# EAGLE board ADXL335_Breakout-Panel-v14 (EAGLE 6.5.0), part 1 of 2
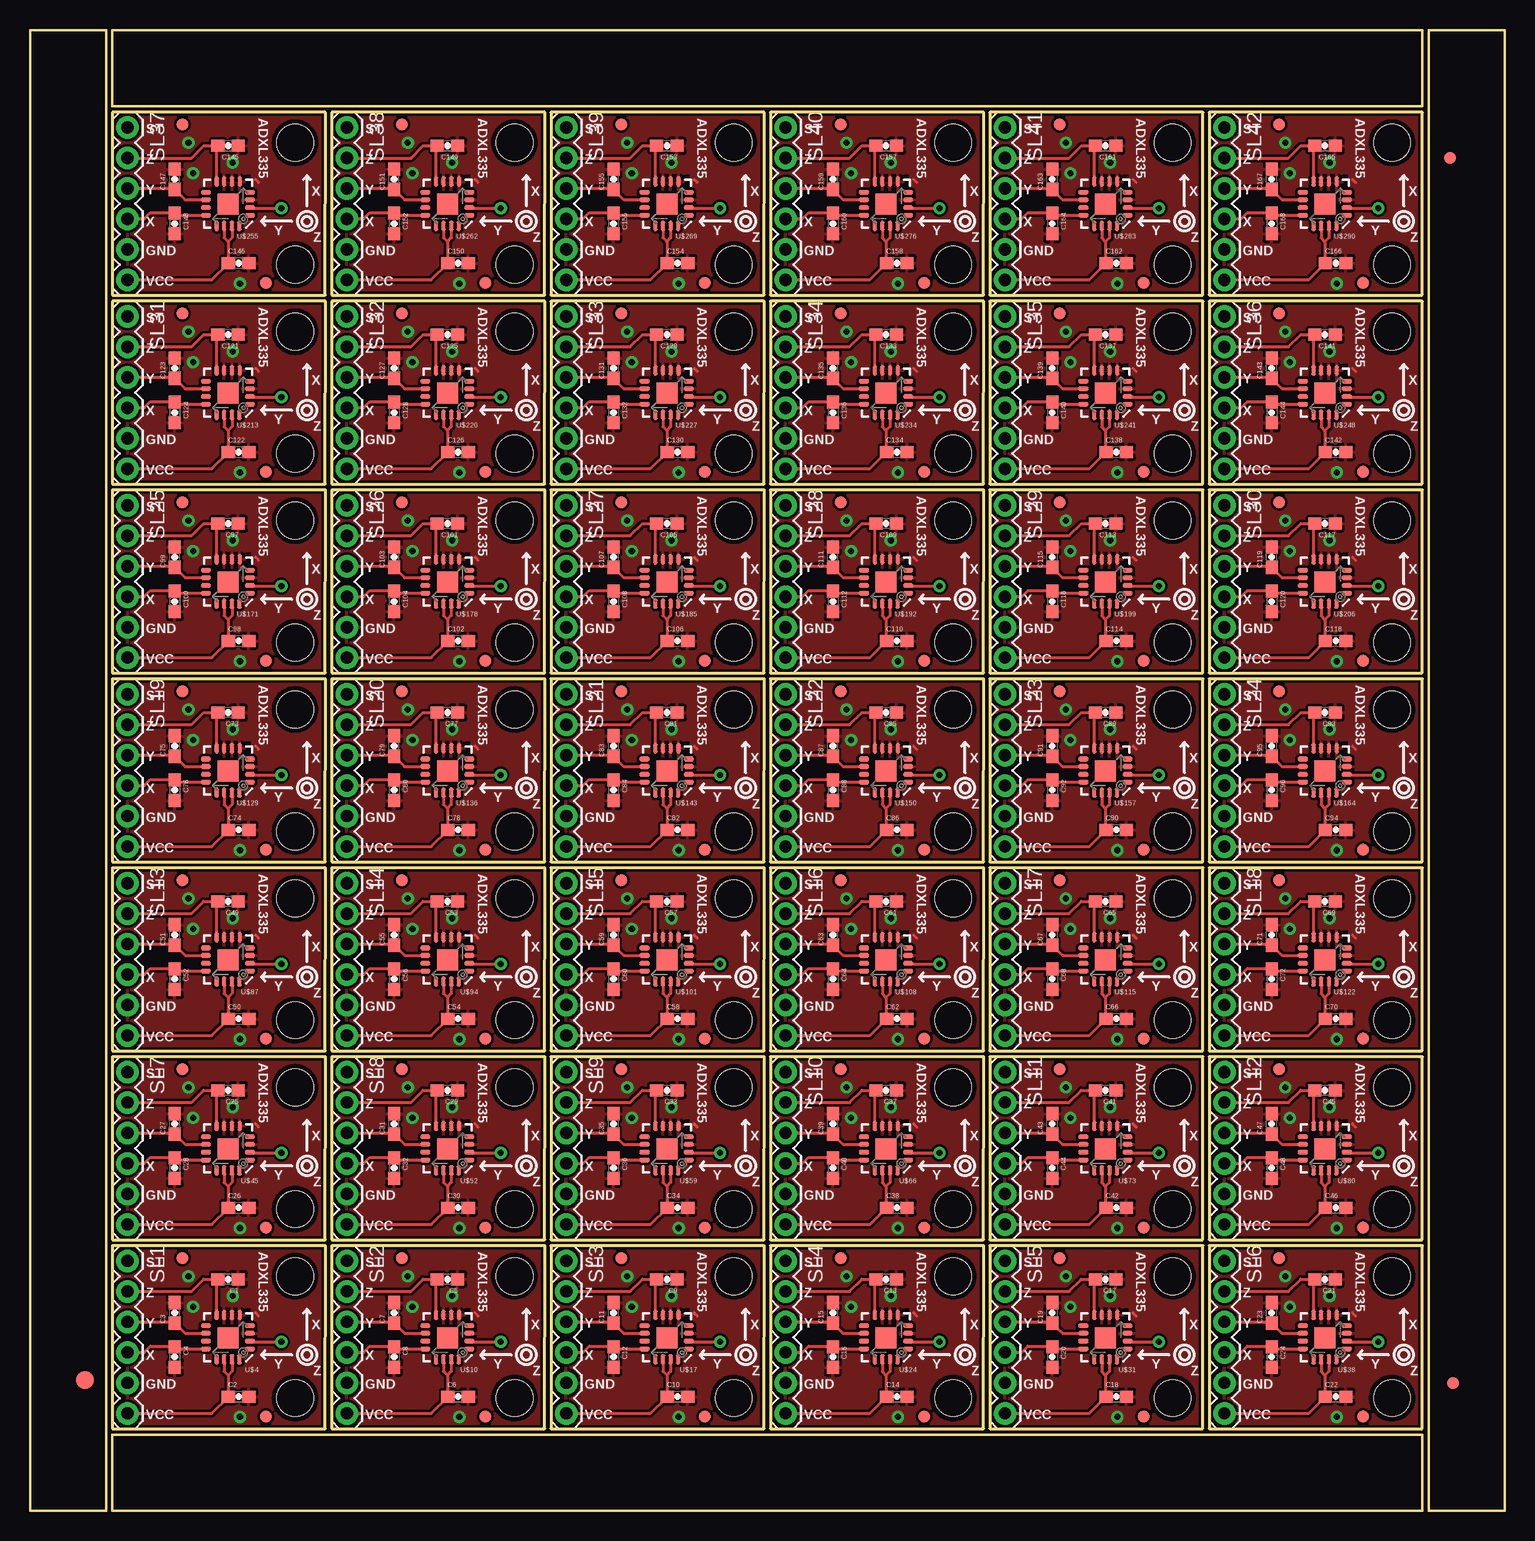
[diagram p0: board, top side]
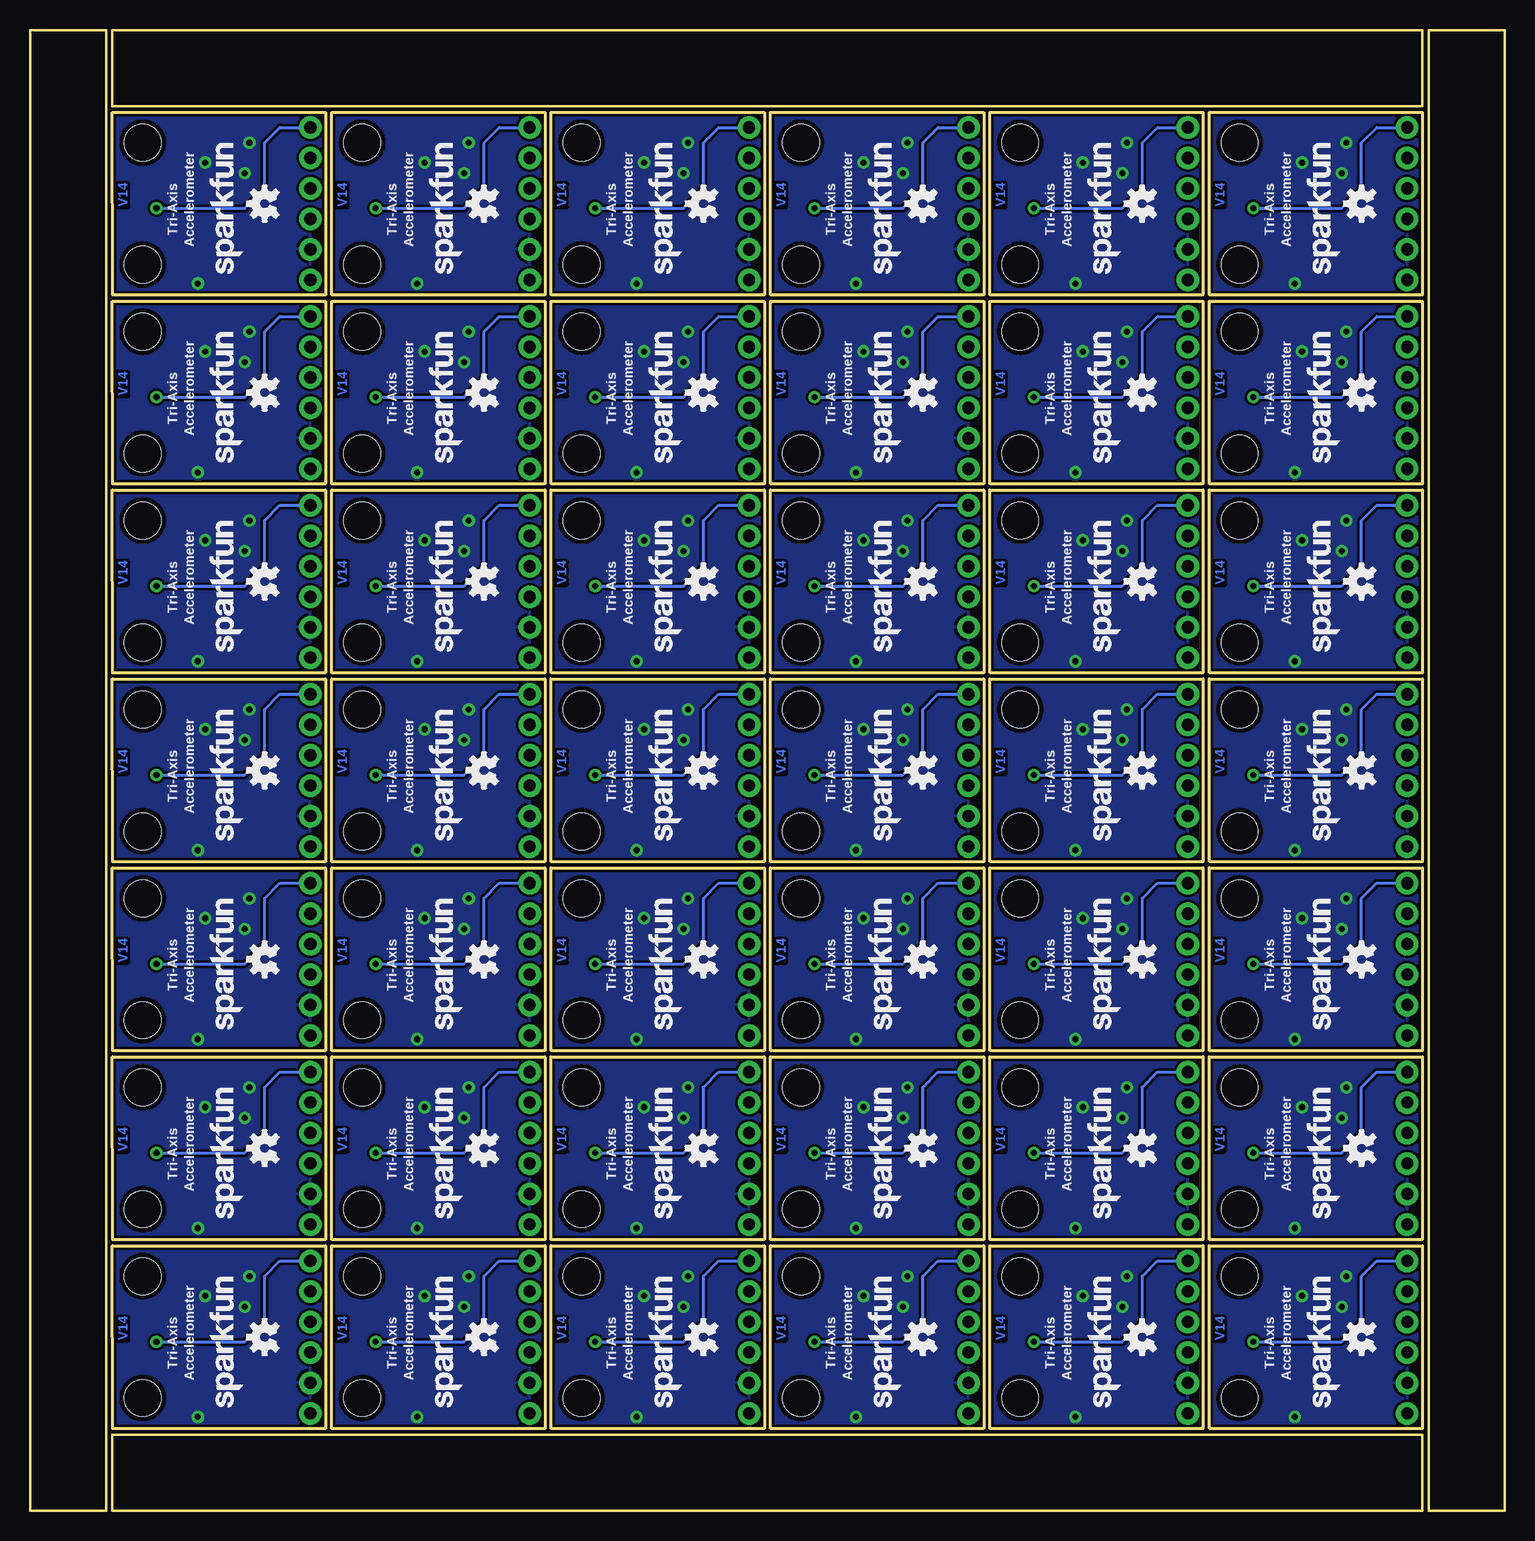
[diagram p1: board, bottom side, seen from below]

Size 122.94 x 123.44 mm. Coordinates in mm from the lower left corner, seen from the top.
Outline: 188 segments
Copper layers (1*16): Top 0.035mm / dielectric 1.5mm / Bottom 0.035mm
Design rules "SparkFun": minimum track width 7mil, minimum drill 15mil, track to track 8mil, track to pad 8mil, pad to pad 8mil, via to via 8mil, smd to smd 8mil, copper to edge 8mil, drill to drill 8mil, minimum pad ring 12mil, minimum via ring 10mil, stop-mask expansion 4mil, vias tented up to drill 20mil, thermal gap 10mil
tRestrict: area 16.4,16.3 to 16.6,16.4; area 17,16.3 to 17.3,16.4; area 18,15.7 to 18.4,16.9; area 34.7,16.3 to 34.9,16.4; area 35.3,16.3 to 35.6,16.4; area 36.3,15.7 to 36.7,16.9; area 53,16.3 to 53.2,16.4; area 53.6,16.3 to 53.9,16.4; area 54.6,15.7 to 55,16.9; area 71.2,16.3 to 71.5,16.4; area 71.9,16.3 to 72.2,16.4; area 72.9,15.7 to 73.3,16.9; 114 more areas

## Footprints (pad centres in the part's own frame; a part is rotated, then mirrored left to right if it is on the bottom)
0603-CAP = smd 1.1 x 1: 1 -0.85,0; 2 0.85,0
FIDUCIAL-1.5X3 = smd 1.5 x 1.5: 1 0,0
FIDUCIAL-1X2 = smd 1 x 1: 1 0,0
1X06 = drill 1.016 pad 1.88: 1 0,0; 2 2.54,0; 3 5.08,0; 4 7.62,0; 5 10.16,0; 6 12.7,0
ADXL335-P = smd 1.75 x 1.75: 0 0,0.051 | smd 0.838 x 0.37: 1 -1.826,0.975; 2 -1.826,0.325; 3 -1.826,-0.325; 4 -1.826,-0.95; 9 1.852,-0.95; 10 1.852,-0.325; 11 1.852,0.325; 12 1.852,0.975 | smd 0.37 x 0.838: 5 -0.975,-1.852; 6 -0.325,-1.852; 7 0.325,-1.852; 8 0.95,-1.852; 13 0.95,1.852; 14 0.325,1.852; 15 -0.325,1.852; 16 -0.95,1.852
STAND-OFF-TIGHT = hole 3.048: 0,0

## Placement (x,y rotation side)
C1  0.1uF  [0603-CAP]  16.51,19.3 180 top
C2  0.1uF  [0603-CAP]  17.4,9.53 0 top
C3  0.1uF  [0603-CAP]  12.06,16.51 90 top
C4  0.1uF  [0603-CAP]  12.06,12.83 270 top
C5  0.1uF  [0603-CAP]  34.8,19.3 180 top
C6  0.1uF  [0603-CAP]  35.69,9.53 0 top
C7  0.1uF  [0603-CAP]  30.35,16.51 90 top
C8  0.1uF  [0603-CAP]  30.35,12.83 270 top
C9  0.1uF  [0603-CAP]  53.09,19.3 180 top
C10  0.1uF  [0603-CAP]  53.98,9.53 0 top
C11  0.1uF  [0603-CAP]  48.64,16.51 90 top
C12  0.1uF  [0603-CAP]  48.64,12.83 270 top
C13  0.1uF  [0603-CAP]  71.37,19.3 180 top
C14  0.1uF  [0603-CAP]  72.26,9.53 0 top
C15  0.1uF  [0603-CAP]  66.93,16.51 90 top
C16  0.1uF  [0603-CAP]  66.93,12.83 270 top
C17  0.1uF  [0603-CAP]  89.66,19.3 180 top
C18  0.1uF  [0603-CAP]  90.55,9.53 0 top
C19  0.1uF  [0603-CAP]  85.22,16.51 90 top
C20  0.1uF  [0603-CAP]  85.22,12.83 270 top
C21  0.1uF  [0603-CAP]  107.95,19.3 180 top
C22  0.1uF  [0603-CAP]  108.84,9.53 0 top
C23  0.1uF  [0603-CAP]  103.5,16.51 90 top
C24  0.1uF  [0603-CAP]  103.5,12.83 270 top
C25  0.1uF  [0603-CAP]  16.51,35.05 180 top
C26  0.1uF  [0603-CAP]  17.4,25.27 0 top
C27  0.1uF  [0603-CAP]  12.06,32.26 90 top
C28  0.1uF  [0603-CAP]  12.06,28.57 270 top
C29  0.1uF  [0603-CAP]  34.8,35.05 180 top
C30  0.1uF  [0603-CAP]  35.69,25.27 0 top
C31  0.1uF  [0603-CAP]  30.35,32.26 90 top
C32  0.1uF  [0603-CAP]  30.35,28.57 270 top
C33  0.1uF  [0603-CAP]  53.09,35.05 180 top
C34  0.1uF  [0603-CAP]  53.98,25.27 0 top
C35  0.1uF  [0603-CAP]  48.64,32.26 90 top
C36  0.1uF  [0603-CAP]  48.64,28.57 270 top
C37  0.1uF  [0603-CAP]  71.37,35.05 180 top
C38  0.1uF  [0603-CAP]  72.26,25.27 0 top
C39  0.1uF  [0603-CAP]  66.93,32.26 90 top
C40  0.1uF  [0603-CAP]  66.93,28.57 270 top
C41  0.1uF  [0603-CAP]  89.66,35.05 180 top
C42  0.1uF  [0603-CAP]  90.55,25.27 0 top
C43  0.1uF  [0603-CAP]  85.22,32.26 90 top
C44  0.1uF  [0603-CAP]  85.22,28.57 270 top
C45  0.1uF  [0603-CAP]  107.95,35.05 180 top
C46  0.1uF  [0603-CAP]  108.84,25.27 0 top
C47  0.1uF  [0603-CAP]  103.5,32.26 90 top
C48  0.1uF  [0603-CAP]  103.5,28.57 270 top
C49  0.1uF  [0603-CAP]  16.51,50.8 180 top
C50  0.1uF  [0603-CAP]  17.4,41.02 0 top
C51  0.1uF  [0603-CAP]  12.06,48.01 90 top
C52  0.1uF  [0603-CAP]  12.06,44.32 270 top
C53  0.1uF  [0603-CAP]  34.8,50.8 180 top
C54  0.1uF  [0603-CAP]  35.69,41.02 0 top
C55  0.1uF  [0603-CAP]  30.35,48.01 90 top
C56  0.1uF  [0603-CAP]  30.35,44.32 270 top
C57  0.1uF  [0603-CAP]  53.09,50.8 180 top
C58  0.1uF  [0603-CAP]  53.98,41.02 0 top
C59  0.1uF  [0603-CAP]  48.64,48.01 90 top
C60  0.1uF  [0603-CAP]  48.64,44.32 270 top
C61  0.1uF  [0603-CAP]  71.37,50.8 180 top
C62  0.1uF  [0603-CAP]  72.26,41.02 0 top
C63  0.1uF  [0603-CAP]  66.93,48.01 90 top
C64  0.1uF  [0603-CAP]  66.93,44.32 270 top
C65  0.1uF  [0603-CAP]  89.66,50.8 180 top
C66  0.1uF  [0603-CAP]  90.55,41.02 0 top
C67  0.1uF  [0603-CAP]  85.22,48.01 90 top
C68  0.1uF  [0603-CAP]  85.22,44.32 270 top
C69  0.1uF  [0603-CAP]  107.95,50.8 180 top
C70  0.1uF  [0603-CAP]  108.84,41.02 0 top
C71  0.1uF  [0603-CAP]  103.5,48.01 90 top
C72  0.1uF  [0603-CAP]  103.5,44.32 270 top
C73  0.1uF  [0603-CAP]  16.51,66.55 180 top
C74  0.1uF  [0603-CAP]  17.4,56.77 0 top
C75  0.1uF  [0603-CAP]  12.06,63.75 90 top
C76  0.1uF  [0603-CAP]  12.06,60.07 270 top
C77  0.1uF  [0603-CAP]  34.8,66.55 180 top
C78  0.1uF  [0603-CAP]  35.69,56.77 0 top
C79  0.1uF  [0603-CAP]  30.35,63.75 90 top
C80  0.1uF  [0603-CAP]  30.35,60.07 270 top
C81  0.1uF  [0603-CAP]  53.09,66.55 180 top
C82  0.1uF  [0603-CAP]  53.98,56.77 0 top
C83  0.1uF  [0603-CAP]  48.64,63.75 90 top
C84  0.1uF  [0603-CAP]  48.64,60.07 270 top
C85  0.1uF  [0603-CAP]  71.37,66.55 180 top
C86  0.1uF  [0603-CAP]  72.26,56.77 0 top
C87  0.1uF  [0603-CAP]  66.93,63.75 90 top
C88  0.1uF  [0603-CAP]  66.93,60.07 270 top
C89  0.1uF  [0603-CAP]  89.66,66.55 180 top
C90  0.1uF  [0603-CAP]  90.55,56.77 0 top
C91  0.1uF  [0603-CAP]  85.22,63.75 90 top
C92  0.1uF  [0603-CAP]  85.22,60.07 270 top
C93  0.1uF  [0603-CAP]  107.95,66.55 180 top
C94  0.1uF  [0603-CAP]  108.84,56.77 0 top
C95  0.1uF  [0603-CAP]  103.5,63.75 90 top
C96  0.1uF  [0603-CAP]  103.5,60.07 270 top
C97  0.1uF  [0603-CAP]  16.51,82.3 180 top
C98  0.1uF  [0603-CAP]  17.4,72.52 0 top
C99  0.1uF  [0603-CAP]  12.06,79.5 90 top
C100  0.1uF  [0603-CAP]  12.06,75.82 270 top
C101  0.1uF  [0603-CAP]  34.8,82.3 180 top
C102  0.1uF  [0603-CAP]  35.69,72.52 0 top
C103  0.1uF  [0603-CAP]  30.35,79.5 90 top
C104  0.1uF  [0603-CAP]  30.35,75.82 270 top
C105  0.1uF  [0603-CAP]  53.09,82.3 180 top
C106  0.1uF  [0603-CAP]  53.98,72.52 0 top
C107  0.1uF  [0603-CAP]  48.64,79.5 90 top
C108  0.1uF  [0603-CAP]  48.64,75.82 270 top
C109  0.1uF  [0603-CAP]  71.37,82.3 180 top
C110  0.1uF  [0603-CAP]  72.26,72.52 0 top
C111  0.1uF  [0603-CAP]  66.93,79.5 90 top
C112  0.1uF  [0603-CAP]  66.93,75.82 270 top
C113  0.1uF  [0603-CAP]  89.66,82.3 180 top
C114  0.1uF  [0603-CAP]  90.55,72.52 0 top
C115  0.1uF  [0603-CAP]  85.22,79.5 90 top
C116  0.1uF  [0603-CAP]  85.22,75.82 270 top
C117  0.1uF  [0603-CAP]  107.95,82.3 180 top
C118  0.1uF  [0603-CAP]  108.84,72.52 0 top
C119  0.1uF  [0603-CAP]  103.5,79.5 90 top
C120  0.1uF  [0603-CAP]  103.5,75.82 270 top
C121  0.1uF  [0603-CAP]  16.51,98.04 180 top
C122  0.1uF  [0603-CAP]  17.4,88.27 0 top
C123  0.1uF  [0603-CAP]  12.06,95.25 90 top
C124  0.1uF  [0603-CAP]  12.06,91.57 270 top
C125  0.1uF  [0603-CAP]  34.8,98.04 180 top
C126  0.1uF  [0603-CAP]  35.69,88.27 0 top
C127  0.1uF  [0603-CAP]  30.35,95.25 90 top
C128  0.1uF  [0603-CAP]  30.35,91.57 270 top
C129  0.1uF  [0603-CAP]  53.09,98.04 180 top
C130  0.1uF  [0603-CAP]  53.98,88.27 0 top
C131  0.1uF  [0603-CAP]  48.64,95.25 90 top
C132  0.1uF  [0603-CAP]  48.64,91.57 270 top
C133  0.1uF  [0603-CAP]  71.37,98.04 180 top
C134  0.1uF  [0603-CAP]  72.26,88.27 0 top
C135  0.1uF  [0603-CAP]  66.93,95.25 90 top
C136  0.1uF  [0603-CAP]  66.93,91.57 270 top
C137  0.1uF  [0603-CAP]  89.66,98.04 180 top
C138  0.1uF  [0603-CAP]  90.55,88.27 0 top
C139  0.1uF  [0603-CAP]  85.22,95.25 90 top
C140  0.1uF  [0603-CAP]  85.22,91.57 270 top
C141  0.1uF  [0603-CAP]  107.95,98.04 180 top
C142  0.1uF  [0603-CAP]  108.84,88.27 0 top
C143  0.1uF  [0603-CAP]  103.5,95.25 90 top
C144  0.1uF  [0603-CAP]  103.5,91.57 270 top
C145  0.1uF  [0603-CAP]  16.51,113.79 180 top
C146  0.1uF  [0603-CAP]  17.4,104.01 0 top
C147  0.1uF  [0603-CAP]  12.06,111 90 top
C148  0.1uF  [0603-CAP]  12.06,107.31 270 top
C149  0.1uF  [0603-CAP]  34.8,113.79 180 top
C150  0.1uF  [0603-CAP]  35.69,104.01 0 top
C151  0.1uF  [0603-CAP]  30.35,111 90 top
C152  0.1uF  [0603-CAP]  30.35,107.31 270 top
C153  0.1uF  [0603-CAP]  53.09,113.79 180 top
C154  0.1uF  [0603-CAP]  53.98,104.01 0 top
C155  0.1uF  [0603-CAP]  48.64,111 90 top
C156  0.1uF  [0603-CAP]  48.64,107.31 270 top
C157  0.1uF  [0603-CAP]  71.37,113.79 180 top
C158  0.1uF  [0603-CAP]  72.26,104.01 0 top
C159  0.1uF  [0603-CAP]  66.93,111 90 top
C160  0.1uF  [0603-CAP]  66.93,107.31 270 top
C161  0.1uF  [0603-CAP]  89.66,113.79 180 top
C162  0.1uF  [0603-CAP]  90.55,104.01 0 top
C163  0.1uF  [0603-CAP]  85.22,111 90 top
C164  0.1uF  [0603-CAP]  85.22,107.31 270 top
C165  0.1uF  [0603-CAP]  107.95,113.79 180 top
C166  0.1uF  [0603-CAP]  108.84,104.01 0 top
C167  0.1uF  [0603-CAP]  103.5,111 90 top
C168  0.1uF  [0603-CAP]  103.5,107.31 270 top
E$1  [FIDUCIAL-1.5X3]  4.57,10.92 0 top
E$4  [FIDUCIAL-1X2]  118.62,10.67 0 top
E$5  [FIDUCIAL-1X2]  118.36,112.78 180 top
SL1  [1X06]  8.13,20.83 270 top
SL2  [1X06]  26.42,20.83 270 top
SL3  [1X06]  44.7,20.83 270 top
SL4  [1X06]  62.99,20.83 270 top
SL5  [1X06]  81.28,20.83 270 top
SL6  [1X06]  99.57,20.83 270 top
SL7  [1X06]  8.13,36.58 270 top
SL8  [1X06]  26.42,36.58 270 top
SL9  [1X06]  44.7,36.58 270 top
SL10  [1X06]  62.99,36.58 270 top
SL11  [1X06]  81.28,36.58 270 top
SL12  [1X06]  99.57,36.58 270 top
SL13  [1X06]  8.13,52.32 270 top
SL14  [1X06]  26.42,52.32 270 top
SL15  [1X06]  44.7,52.32 270 top
SL16  [1X06]  62.99,52.32 270 top
SL17  [1X06]  81.28,52.32 270 top
SL18  [1X06]  99.57,52.32 270 top
SL19  [1X06]  8.13,68.07 270 top
SL20  [1X06]  26.42,68.07 270 top
SL21  [1X06]  44.7,68.07 270 top
SL22  [1X06]  62.99,68.07 270 top
SL23  [1X06]  81.28,68.07 270 top
SL24  [1X06]  99.57,68.07 270 top
SL25  [1X06]  8.13,83.82 270 top
SL26  [1X06]  26.42,83.82 270 top
SL27  [1X06]  44.7,83.82 270 top
SL28  [1X06]  62.99,83.82 270 top
SL29  [1X06]  81.28,83.82 270 top
SL30  [1X06]  99.57,83.82 270 top
SL31  [1X06]  8.13,99.57 270 top
SL32  [1X06]  26.42,99.57 270 top
SL33  [1X06]  44.7,99.57 270 top
SL34  [1X06]  62.99,99.57 270 top
SL35  [1X06]  81.28,99.57 270 top
SL36  [1X06]  99.57,99.57 270 top
SL37  [1X06]  8.13,115.32 270 top
SL38  [1X06]  26.42,115.32 270 top
SL39  [1X06]  44.7,115.32 270 top
SL40  [1X06]  62.99,115.32 270 top
SL41  [1X06]  81.28,115.32 270 top
SL42  [1X06]  99.57,115.32 270 top
U$1  FIDUCIAL1X2  [FIDUCIAL-1X2]  12.7,21.08 0 top
U$2  FIDUCIAL1X2  [FIDUCIAL-1X2]  30.99,21.08 0 top
U$3  FIDUCIAL1X2  [FIDUCIAL-1X2]  19.68,7.87 0 top
U$4  ADXL335-PATRICK""  [ADXL335-P]  16.51,14.48 180 top
U$5  [OSHW-LOGO-S]  11.94,14.48 90 bottom
U$6  [STAND-OFF-TIGHT]  22.1,9.4 0 top
U$7  [STAND-OFF-TIGHT]  22.1,19.56 0 top
U$8  [SFE_LOGO_NAME_.1]  13.21,8.13 90 bottom
U$9  FIDUCIAL1X2  [FIDUCIAL-1X2]  37.97,7.87 0 top
U$10  ADXL335-PATRICK""  [ADXL335-P]  34.8,14.48 180 top
U$11  [STAND-OFF-TIGHT]  40.39,9.4 0 top
U$12  [STAND-OFF-TIGHT]  40.39,19.56 0 top
U$13  [OSHW-LOGO-S]  30.23,14.48 90 bottom
U$14  [SFE_LOGO_NAME_.1]  31.5,8.13 90 bottom
U$15  FIDUCIAL1X2  [FIDUCIAL-1X2]  49.28,21.08 0 top
U$16  FIDUCIAL1X2  [FIDUCIAL-1X2]  56.26,7.87 0 top
U$17  ADXL335-PATRICK""  [ADXL335-P]  53.09,14.48 180 top
U$18  [STAND-OFF-TIGHT]  58.67,9.4 0 top
U$19  [STAND-OFF-TIGHT]  58.67,19.56 0 top
U$20  [OSHW-LOGO-S]  48.51,14.48 90 bottom
U$21  [SFE_LOGO_NAME_.1]  49.78,8.13 90 bottom
U$22  FIDUCIAL1X2  [FIDUCIAL-1X2]  67.56,21.08 0 top
U$23  FIDUCIAL1X2  [FIDUCIAL-1X2]  74.55,7.87 0 top
U$24  ADXL335-PATRICK""  [ADXL335-P]  71.37,14.48 180 top
U$25  [STAND-OFF-TIGHT]  76.96,9.4 0 top
U$26  [STAND-OFF-TIGHT]  76.96,19.56 0 top
U$27  [OSHW-LOGO-S]  66.8,14.48 90 bottom
U$28  [SFE_LOGO_NAME_.1]  68.07,8.13 90 bottom
U$29  FIDUCIAL1X2  [FIDUCIAL-1X2]  85.85,21.08 0 top
U$30  FIDUCIAL1X2  [FIDUCIAL-1X2]  92.84,7.87 0 top
U$31  ADXL335-PATRICK""  [ADXL335-P]  89.66,14.48 180 top
U$32  [STAND-OFF-TIGHT]  95.25,9.4 0 top
U$33  [STAND-OFF-TIGHT]  95.25,19.56 0 top
U$34  [OSHW-LOGO-S]  85.09,14.48 90 bottom
U$35  [SFE_LOGO_NAME_.1]  86.36,8.13 90 bottom
U$36  FIDUCIAL1X2  [FIDUCIAL-1X2]  104.14,21.08 0 top
U$37  FIDUCIAL1X2  [FIDUCIAL-1X2]  111.12,7.87 0 top
U$38  ADXL335-PATRICK""  [ADXL335-P]  107.95,14.48 180 top
U$39  [STAND-OFF-TIGHT]  113.54,9.4 0 top
U$40  [STAND-OFF-TIGHT]  113.54,19.56 0 top
U$41  [OSHW-LOGO-S]  103.38,14.48 90 bottom
U$42  [SFE_LOGO_NAME_.1]  104.65,8.13 90 bottom
U$43  FIDUCIAL1X2  [FIDUCIAL-1X2]  12.7,36.83 0 top
U$44  FIDUCIAL1X2  [FIDUCIAL-1X2]  19.68,23.62 0 top
U$45  ADXL335-PATRICK""  [ADXL335-P]  16.51,30.23 180 top
U$46  [STAND-OFF-TIGHT]  22.1,25.15 0 top
U$47  [STAND-OFF-TIGHT]  22.1,35.31 0 top
U$48  [OSHW-LOGO-S]  11.94,30.23 90 bottom
U$49  [SFE_LOGO_NAME_.1]  13.21,23.88 90 bottom
U$50  FIDUCIAL1X2  [FIDUCIAL-1X2]  30.99,36.83 0 top
U$51  FIDUCIAL1X2  [FIDUCIAL-1X2]  37.97,23.62 0 top
U$52  ADXL335-PATRICK""  [ADXL335-P]  34.8,30.23 180 top
U$53  [STAND-OFF-TIGHT]  40.39,25.15 0 top
U$54  [STAND-OFF-TIGHT]  40.39,35.31 0 top
U$55  [OSHW-LOGO-S]  30.23,30.23 90 bottom
U$56  [SFE_LOGO_NAME_.1]  31.5,23.88 90 bottom
U$57  FIDUCIAL1X2  [FIDUCIAL-1X2]  49.28,36.83 0 top
U$58  FIDUCIAL1X2  [FIDUCIAL-1X2]  56.26,23.62 0 top
U$59  ADXL335-PATRICK""  [ADXL335-P]  53.09,30.23 180 top
U$60  [STAND-OFF-TIGHT]  58.67,25.15 0 top
U$61  [STAND-OFF-TIGHT]  58.67,35.31 0 top
U$62  [OSHW-LOGO-S]  48.51,30.23 90 bottom
U$63  [SFE_LOGO_NAME_.1]  49.78,23.88 90 bottom
U$64  FIDUCIAL1X2  [FIDUCIAL-1X2]  67.56,36.83 0 top
U$65  FIDUCIAL1X2  [FIDUCIAL-1X2]  74.55,23.62 0 top
U$66  ADXL335-PATRICK""  [ADXL335-P]  71.37,30.23 180 top
U$67  [STAND-OFF-TIGHT]  76.96,25.15 0 top
U$68  [STAND-OFF-TIGHT]  76.96,35.31 0 top
U$69  [OSHW-LOGO-S]  66.8,30.23 90 bottom
U$70  [SFE_LOGO_NAME_.1]  68.07,23.88 90 bottom
U$71  FIDUCIAL1X2  [FIDUCIAL-1X2]  85.85,36.83 0 top
U$72  FIDUCIAL1X2  [FIDUCIAL-1X2]  92.84,23.62 0 top
U$73  ADXL335-PATRICK""  [ADXL335-P]  89.66,30.23 180 top
U$74  [STAND-OFF-TIGHT]  95.25,25.15 0 top
U$75  [STAND-OFF-TIGHT]  95.25,35.31 0 top
U$76  [OSHW-LOGO-S]  85.09,30.23 90 bottom
U$77  [SFE_LOGO_NAME_.1]  86.36,23.88 90 bottom
U$78  FIDUCIAL1X2  [FIDUCIAL-1X2]  104.14,36.83 0 top
U$79  FIDUCIAL1X2  [FIDUCIAL-1X2]  111.12,23.62 0 top
U$80  ADXL335-PATRICK""  [ADXL335-P]  107.95,30.23 180 top
U$81  [STAND-OFF-TIGHT]  113.54,25.15 0 top
U$82  [STAND-OFF-TIGHT]  113.54,35.31 0 top
U$83  [OSHW-LOGO-S]  103.38,30.23 90 bottom
U$84  [SFE_LOGO_NAME_.1]  104.65,23.88 90 bottom
U$85  FIDUCIAL1X2  [FIDUCIAL-1X2]  12.7,52.58 0 top
U$86  FIDUCIAL1X2  [FIDUCIAL-1X2]  19.68,39.37 0 top
U$87  ADXL335-PATRICK""  [ADXL335-P]  16.51,45.97 180 top
U$88  [STAND-OFF-TIGHT]  22.1,40.89 0 top
U$89  [STAND-OFF-TIGHT]  22.1,51.05 0 top
U$90  [OSHW-LOGO-S]  11.94,45.97 90 bottom
U$91  [SFE_LOGO_NAME_.1]  13.21,39.62 90 bottom
U$92  FIDUCIAL1X2  [FIDUCIAL-1X2]  30.99,52.58 0 top
U$93  FIDUCIAL1X2  [FIDUCIAL-1X2]  37.97,39.37 0 top
U$94  ADXL335-PATRICK""  [ADXL335-P]  34.8,45.97 180 top
U$95  [STAND-OFF-TIGHT]  40.39,40.89 0 top
U$96  [STAND-OFF-TIGHT]  40.39,51.05 0 top
U$97  [OSHW-LOGO-S]  30.23,45.97 90 bottom
U$98  [SFE_LOGO_NAME_.1]  31.5,39.62 90 bottom
U$99  FIDUCIAL1X2  [FIDUCIAL-1X2]  49.28,52.58 0 top
U$100  FIDUCIAL1X2  [FIDUCIAL-1X2]  56.26,39.37 0 top
U$101  ADXL335-PATRICK""  [ADXL335-P]  53.09,45.97 180 top
U$102  [STAND-OFF-TIGHT]  58.67,40.89 0 top
U$103  [STAND-OFF-TIGHT]  58.67,51.05 0 top
U$104  [OSHW-LOGO-S]  48.51,45.97 90 bottom
U$105  [SFE_LOGO_NAME_.1]  49.78,39.62 90 bottom
U$106  FIDUCIAL1X2  [FIDUCIAL-1X2]  67.56,52.58 0 top
U$107  FIDUCIAL1X2  [FIDUCIAL-1X2]  74.55,39.37 0 top
U$108  ADXL335-PATRICK""  [ADXL335-P]  71.37,45.97 180 top
U$109  [STAND-OFF-TIGHT]  76.96,40.89 0 top
U$110  [STAND-OFF-TIGHT]  76.96,51.05 0 top
U$111  [OSHW-LOGO-S]  66.8,45.97 90 bottom
U$112  [SFE_LOGO_NAME_.1]  68.07,39.62 90 bottom
U$113  FIDUCIAL1X2  [FIDUCIAL-1X2]  85.85,52.58 0 top
U$114  FIDUCIAL1X2  [FIDUCIAL-1X2]  92.84,39.37 0 top
U$115  ADXL335-PATRICK""  [ADXL335-P]  89.66,45.97 180 top
U$116  [STAND-OFF-TIGHT]  95.25,40.89 0 top
U$117  [STAND-OFF-TIGHT]  95.25,51.05 0 top
U$118  [OSHW-LOGO-S]  85.09,45.97 90 bottom
U$119  [SFE_LOGO_NAME_.1]  86.36,39.62 90 bottom
U$120  FIDUCIAL1X2  [FIDUCIAL-1X2]  104.14,52.58 0 top
U$121  FIDUCIAL1X2  [FIDUCIAL-1X2]  111.12,39.37 0 top
U$122  ADXL335-PATRICK""  [ADXL335-P]  107.95,45.97 180 top
U$123  [STAND-OFF-TIGHT]  113.54,40.89 0 top
U$124  [STAND-OFF-TIGHT]  113.54,51.05 0 top
U$125  [OSHW-LOGO-S]  103.38,45.97 90 bottom
U$126  [SFE_LOGO_NAME_.1]  104.65,39.62 90 bottom
U$127  FIDUCIAL1X2  [FIDUCIAL-1X2]  12.7,68.33 0 top
U$128  FIDUCIAL1X2  [FIDUCIAL-1X2]  19.68,55.12 0 top
U$129  ADXL335-PATRICK""  [ADXL335-P]  16.51,61.72 180 top
U$130  [STAND-OFF-TIGHT]  22.1,56.64 0 top
U$131  [STAND-OFF-TIGHT]  22.1,66.8 0 top
U$132  [OSHW-LOGO-S]  11.94,61.72 90 bottom
U$133  [SFE_LOGO_NAME_.1]  13.21,55.37 90 bottom
U$134  FIDUCIAL1X2  [FIDUCIAL-1X2]  30.99,68.33 0 top
U$135  FIDUCIAL1X2  [FIDUCIAL-1X2]  37.97,55.12 0 top
U$136  ADXL335-PATRICK""  [ADXL335-P]  34.8,61.72 180 top
U$137  [STAND-OFF-TIGHT]  40.39,56.64 0 top
U$138  [STAND-OFF-TIGHT]  40.39,66.8 0 top
U$139  [OSHW-LOGO-S]  30.23,61.72 90 bottom
U$140  [SFE_LOGO_NAME_.1]  31.5,55.37 90 bottom
U$141  FIDUCIAL1X2  [FIDUCIAL-1X2]  49.28,68.33 0 top
U$142  FIDUCIAL1X2  [FIDUCIAL-1X2]  56.26,55.12 0 top
U$143  ADXL335-PATRICK""  [ADXL335-P]  53.09,61.72 180 top
U$144  [STAND-OFF-TIGHT]  58.67,56.64 0 top
U$145  [STAND-OFF-TIGHT]  58.67,66.8 0 top
U$146  [OSHW-LOGO-S]  48.51,61.72 90 bottom
U$147  [SFE_LOGO_NAME_.1]  49.78,55.37 90 bottom
U$148  FIDUCIAL1X2  [FIDUCIAL-1X2]  67.56,68.33 0 top
U$149  FIDUCIAL1X2  [FIDUCIAL-1X2]  74.55,55.12 0 top
U$150  ADXL335-PATRICK""  [ADXL335-P]  71.37,61.72 180 top
U$151  [STAND-OFF-TIGHT]  76.96,56.64 0 top
U$152  [STAND-OFF-TIGHT]  76.96,66.8 0 top
U$153  [OSHW-LOGO-S]  66.8,61.72 90 bottom
U$154  [SFE_LOGO_NAME_.1]  68.07,55.37 90 bottom
U$155  FIDUCIAL1X2  [FIDUCIAL-1X2]  85.85,68.33 0 top
U$156  FIDUCIAL1X2  [FIDUCIAL-1X2]  92.84,55.12 0 top
U$157  ADXL335-PATRICK""  [ADXL335-P]  89.66,61.72 180 top
U$158  [STAND-OFF-TIGHT]  95.25,56.64 0 top
U$159  [STAND-OFF-TIGHT]  95.25,66.8 0 top
U$160  [OSHW-LOGO-S]  85.09,61.72 90 bottom
U$161  [SFE_LOGO_NAME_.1]  86.36,55.37 90 bottom
U$162  FIDUCIAL1X2  [FIDUCIAL-1X2]  104.14,68.33 0 top
U$163  FIDUCIAL1X2  [FIDUCIAL-1X2]  111.12,55.12 0 top
U$164  ADXL335-PATRICK""  [ADXL335-P]  107.95,61.72 180 top
U$165  [STAND-OFF-TIGHT]  113.54,56.64 0 top
U$166  [STAND-OFF-TIGHT]  113.54,66.8 0 top
U$167  [OSHW-LOGO-S]  103.38,61.72 90 bottom
U$168  [SFE_LOGO_NAME_.1]  104.65,55.37 90 bottom
U$169  FIDUCIAL1X2  [FIDUCIAL-1X2]  12.7,84.07 0 top
U$170  FIDUCIAL1X2  [FIDUCIAL-1X2]  19.68,70.87 0 top
U$171  ADXL335-PATRICK""  [ADXL335-P]  16.51,77.47 180 top
U$172  [STAND-OFF-TIGHT]  22.1,72.39 0 top
U$173  [STAND-OFF-TIGHT]  22.1,82.55 0 top
U$174  [OSHW-LOGO-S]  11.94,77.47 90 bottom
U$175  [SFE_LOGO_NAME_.1]  13.21,71.12 90 bottom
U$176  FIDUCIAL1X2  [FIDUCIAL-1X2]  30.99,84.07 0 top
U$177  FIDUCIAL1X2  [FIDUCIAL-1X2]  37.97,70.87 0 top
U$178  ADXL335-PATRICK""  [ADXL335-P]  34.8,77.47 180 top
U$179  [STAND-OFF-TIGHT]  40.39,72.39 0 top
U$180  [STAND-OFF-TIGHT]  40.39,82.55 0 top
U$181  [OSHW-LOGO-S]  30.23,77.47 90 bottom
U$182  [SFE_LOGO_NAME_.1]  31.5,71.12 90 bottom
U$183  FIDUCIAL1X2  [FIDUCIAL-1X2]  49.28,84.07 0 top
U$184  FIDUCIAL1X2  [FIDUCIAL-1X2]  56.26,70.87 0 top
U$185  ADXL335-PATRICK""  [ADXL335-P]  53.09,77.47 180 top
U$186  [STAND-OFF-TIGHT]  58.67,72.39 0 top
U$187  [STAND-OFF-TIGHT]  58.67,82.55 0 top
U$188  [OSHW-LOGO-S]  48.51,77.47 90 bottom
U$189  [SFE_LOGO_NAME_.1]  49.78,71.12 90 bottom
U$190  FIDUCIAL1X2  [FIDUCIAL-1X2]  67.56,84.07 0 top
U$191  FIDUCIAL1X2  [FIDUCIAL-1X2]  74.55,70.87 0 top
U$192  ADXL335-PATRICK""  [ADXL335-P]  71.37,77.47 180 top
U$193  [STAND-OFF-TIGHT]  76.96,72.39 0 top
U$194  [STAND-OFF-TIGHT]  76.96,82.55 0 top
U$195  [OSHW-LOGO-S]  66.8,77.47 90 bottom
U$196  [SFE_LOGO_NAME_.1]  68.07,71.12 90 bottom
U$197  FIDUCIAL1X2  [FIDUCIAL-1X2]  85.85,84.07 0 top
U$198  FIDUCIAL1X2  [FIDUCIAL-1X2]  92.84,70.87 0 top
U$199  ADXL335-PATRICK""  [ADXL335-P]  89.66,77.47 180 top
U$200  [STAND-OFF-TIGHT]  95.25,72.39 0 top
U$201  [STAND-OFF-TIGHT]  95.25,82.55 0 top
U$202  [OSHW-LOGO-S]  85.09,77.47 90 bottom
U$203  [SFE_LOGO_NAME_.1]  86.36,71.12 90 bottom
U$204  FIDUCIAL1X2  [FIDUCIAL-1X2]  104.14,84.07 0 top
U$205  FIDUCIAL1X2  [FIDUCIAL-1X2]  111.12,70.87 0 top
U$206  ADXL335-PATRICK""  [ADXL335-P]  107.95,77.47 180 top
U$207  [STAND-OFF-TIGHT]  113.54,72.39 0 top
U$208  [STAND-OFF-TIGHT]  113.54,82.55 0 top
U$209  [OSHW-LOGO-S]  103.38,77.47 90 bottom
U$210  [SFE_LOGO_NAME_.1]  104.65,71.12 90 bottom
U$211  FIDUCIAL1X2  [FIDUCIAL-1X2]  12.7,99.82 0 top
U$212  FIDUCIAL1X2  [FIDUCIAL-1X2]  19.68,86.61 0 top
U$213  ADXL335-PATRICK""  [ADXL335-P]  16.51,93.22 180 top
U$214  [STAND-OFF-TIGHT]  22.1,88.14 0 top
U$215  [STAND-OFF-TIGHT]  22.1,98.3 0 top
U$216  [OSHW-LOGO-S]  11.94,93.22 90 bottom
U$217  [SFE_LOGO_NAME_.1]  13.21,86.87 90 bottom
U$218  FIDUCIAL1X2  [FIDUCIAL-1X2]  30.99,99.82 0 top
U$219  FIDUCIAL1X2  [FIDUCIAL-1X2]  37.97,86.61 0 top
U$220  ADXL335-PATRICK""  [ADXL335-P]  34.8,93.22 180 top
U$221  [STAND-OFF-TIGHT]  40.39,88.14 0 top
U$222  [STAND-OFF-TIGHT]  40.39,98.3 0 top
U$223  [OSHW-LOGO-S]  30.23,93.22 90 bottom
U$224  [SFE_LOGO_NAME_.1]  31.5,86.87 90 bottom
U$225  FIDUCIAL1X2  [FIDUCIAL-1X2]  49.28,99.82 0 top
U$226  FIDUCIAL1X2  [FIDUCIAL-1X2]  56.26,86.61 0 top
U$227  ADXL335-PATRICK""  [ADXL335-P]  53.09,93.22 180 top
U$228  [STAND-OFF-TIGHT]  58.67,88.14 0 top
U$229  [STAND-OFF-TIGHT]  58.67,98.3 0 top
U$230  [OSHW-LOGO-S]  48.51,93.22 90 bottom
U$231  [SFE_LOGO_NAME_.1]  49.78,86.87 90 bottom
U$232  FIDUCIAL1X2  [FIDUCIAL-1X2]  67.56,99.82 0 top
U$233  FIDUCIAL1X2  [FIDUCIAL-1X2]  74.55,86.61 0 top
U$234  ADXL335-PATRICK""  [ADXL335-P]  71.37,93.22 180 top
U$235  [STAND-OFF-TIGHT]  76.96,88.14 0 top
U$236  [STAND-OFF-TIGHT]  76.96,98.3 0 top
U$237  [OSHW-LOGO-S]  66.8,93.22 90 bottom
U$238  [SFE_LOGO_NAME_.1]  68.07,86.87 90 bottom
U$239  FIDUCIAL1X2  [FIDUCIAL-1X2]  85.85,99.82 0 top
U$240  FIDUCIAL1X2  [FIDUCIAL-1X2]  92.84,86.61 0 top
U$241  ADXL335-PATRICK""  [ADXL335-P]  89.66,93.22 180 top
U$242  [STAND-OFF-TIGHT]  95.25,88.14 0 top
U$243  [STAND-OFF-TIGHT]  95.25,98.3 0 top
U$244  [OSHW-LOGO-S]  85.09,93.22 90 bottom
U$245  [SFE_LOGO_NAME_.1]  86.36,86.87 90 bottom
U$246  FIDUCIAL1X2  [FIDUCIAL-1X2]  104.14,99.82 0 top
U$247  FIDUCIAL1X2  [FIDUCIAL-1X2]  111.12,86.61 0 top
U$248  ADXL335-PATRICK""  [ADXL335-P]  107.95,93.22 180 top
U$249  [STAND-OFF-TIGHT]  113.54,88.14 0 top
U$250  [STAND-OFF-TIGHT]  113.54,98.3 0 top
U$251  [OSHW-LOGO-S]  103.38,93.22 90 bottom
U$252  [SFE_LOGO_NAME_.1]  104.65,86.87 90 bottom
U$253  FIDUCIAL1X2  [FIDUCIAL-1X2]  12.7,115.57 0 top
U$254  FIDUCIAL1X2  [FIDUCIAL-1X2]  19.68,102.36 0 top
U$255  ADXL335-PATRICK""  [ADXL335-P]  16.51,108.97 180 top
U$256  [STAND-OFF-TIGHT]  22.1,103.89 0 top
U$257  [STAND-OFF-TIGHT]  22.1,114.05 0 top
U$258  [OSHW-LOGO-S]  11.94,108.97 90 bottom
U$259  [SFE_LOGO_NAME_.1]  13.21,102.62 90 bottom
U$260  FIDUCIAL1X2  [FIDUCIAL-1X2]  30.99,115.57 0 top
U$261  FIDUCIAL1X2  [FIDUCIAL-1X2]  37.97,102.36 0 top
U$262  ADXL335-PATRICK""  [ADXL335-P]  34.8,108.97 180 top
U$263  [STAND-OFF-TIGHT]  40.39,103.89 0 top
U$264  [STAND-OFF-TIGHT]  40.39,114.05 0 top
U$265  [OSHW-LOGO-S]  30.23,108.97 90 bottom
U$266  [SFE_LOGO_NAME_.1]  31.5,102.62 90 bottom
U$267  FIDUCIAL1X2  [FIDUCIAL-1X2]  49.28,115.57 0 top
U$268  FIDUCIAL1X2  [FIDUCIAL-1X2]  56.26,102.36 0 top
U$269  ADXL335-PATRICK""  [ADXL335-P]  53.09,108.97 180 top
U$270  [STAND-OFF-TIGHT]  58.67,103.89 0 top
U$271  [STAND-OFF-TIGHT]  58.67,114.05 0 top
U$272  [OSHW-LOGO-S]  48.51,108.97 90 bottom
U$273  [SFE_LOGO_NAME_.1]  49.78,102.62 90 bottom
U$274  FIDUCIAL1X2  [FIDUCIAL-1X2]  67.56,115.57 0 top
U$275  FIDUCIAL1X2  [FIDUCIAL-1X2]  74.55,102.36 0 top
U$276  ADXL335-PATRICK""  [ADXL335-P]  71.37,108.97 180 top
U$277  [STAND-OFF-TIGHT]  76.96,103.89 0 top
U$278  [STAND-OFF-TIGHT]  76.96,114.05 0 top
U$279  [OSHW-LOGO-S]  66.8,108.97 90 bottom
U$280  [SFE_LOGO_NAME_.1]  68.07,102.62 90 bottom
U$281  FIDUCIAL1X2  [FIDUCIAL-1X2]  85.85,115.57 0 top
U$282  FIDUCIAL1X2  [FIDUCIAL-1X2]  92.84,102.36 0 top
U$283  ADXL335-PATRICK""  [ADXL335-P]  89.66,108.97 180 top
U$284  [STAND-OFF-TIGHT]  95.25,103.89 0 top
U$285  [STAND-OFF-TIGHT]  95.25,114.05 0 top
U$286  [OSHW-LOGO-S]  85.09,108.97 90 bottom
U$287  [SFE_LOGO_NAME_.1]  86.36,102.62 90 bottom
U$288  FIDUCIAL1X2  [FIDUCIAL-1X2]  104.14,115.57 0 top
U$289  FIDUCIAL1X2  [FIDUCIAL-1X2]  111.12,102.36 0 top
U$290  ADXL335-PATRICK""  [ADXL335-P]  107.95,108.97 180 top
U$291  [STAND-OFF-TIGHT]  113.54,103.89 0 top
U$292  [STAND-OFF-TIGHT]  113.54,114.05 0 top
U$293  [OSHW-LOGO-S]  103.38,108.97 90 bottom
U$294  [SFE_LOGO_NAME_.1]  104.65,102.62 90 bottom

## Library data of the parts
C1-C168 SL1-SL42 U$1-U$3 U$6 U$7 U$9 U$11 U$12 U$15 U$16 U$18 U$19 U$22 U$23 U$25 U$26 U$29 U$30 U$32 U$33 U$36 U$37 U$39 U$40 U$43 U$44 U$46 U$47 U$50 U$51 U$53 U$54 U$57 U$58 U$60 U$61 U$64 U$65 U$67 U$68 U$71 U$72 U$74 U$75 U$78 U$79 U$81 U$82 U$85 U$86 U$88 U$89 U$92 U$93 U$95 U$96 U$99 U$100 U$102 U$103 U$106 U$107 U$109 U$110 U$113 U$114 U$116 U$117 U$120 U$121 U$123 U$124 U$127 U$128 U$130 U$131 U$134 U$135 U$137 U$138 U$141 U$142 U$144 U$145 U$148 U$149 U$151 U$152 U$155 U$156 U$158 U$159 U$162 U$163 U$165 U$166 U$169 U$170 U$172 U$173 U$176 U$177 U$179 U$180 U$183 U$184 U$186 U$187 U$190 U$191 U$193 U$194 U$197 U$198 U$200 U$201 U$204 U$205 U$207 U$208 U$211 U$212 U$214 U$215 U$218 U$219 U$221 U$222 U$225 U$226 U$228 U$229 U$232 U$233 U$235 U$236 U$239 U$240 U$242 U$243 U$246 U$247 U$249 U$250 U$253 U$254 U$256 U$257 U$260 U$261 U$263 U$264 U$267 U$268 U$270 U$271 U$274 U$275 U$277 U$278 U$281 U$282 U$284 U$285 U$288 U$289 U$291 U$292 = SparkFun
E$1 E$4 E$5 U$5 U$8 U$13 U$14 U$20 U$21 U$27 U$28 U$34 U$35 U$41 U$42 U$48 U$49 U$55 U$56 U$62 U$63 U$69 U$70 U$76 U$77 U$83 U$84 U$90 U$91 U$97 U$98 U$104 U$105 U$111 U$112 U$118 U$119 U$125 U$126 U$132 U$133 U$139 U$140 U$146 U$147 U$153 U$154 U$160 U$161 U$167 U$168 U$174 U$175 U$181 U$182 U$188 U$189 U$195 U$196 U$202 U$203 U$209 U$210 U$216 U$217 U$223 U$224 U$230 U$231 U$237 U$238 U$244 U$245 U$251 U$252 U$258 U$259 U$265 U$266 U$272 U$273 U$279 U$280 U$286 U$287 U$293 U$294 = SparkFun-Aesthetics
U$4 U$10 U$17 U$24 U$31 U$38 U$45 U$52 U$59 U$66 U$73 U$80 U$87 U$94 U$101 U$108 U$115 U$122 U$129 U$136 U$143 U$150 U$157 U$164 U$171 U$178 U$185 U$192 U$199 U$206 U$213 U$220 U$227 U$234 U$241 U$248 U$255 U$262 U$269 U$276 U$283 U$290 = Testing

## Nets
GND: C1.1 C2.2 C3.2 C4.2 SL1.5 U$4.3 U$4.5 U$4.6 U$4.7
GND1: C5.1 C6.2 C7.2 C8.2 SL2.5 U$10.3 U$10.5 U$10.6 U$10.7
GND2: C9.1 C10.2 C11.2 C12.2 SL3.5 U$17.3 U$17.5 U$17.6 U$17.7
GND3: C13.1 C14.2 C15.2 C16.2 SL4.5 U$24.3 U$24.5 U$24.6 U$24.7
GND4: C17.1 C18.2 C19.2 C20.2 SL5.5 U$31.3 U$31.5 U$31.6 U$31.7
GND5: C21.1 C22.2 C23.2 C24.2 SL6.5 U$38.3 U$38.5 U$38.6 U$38.7
GND6: C25.1 C26.2 C27.2 C28.2 SL7.5 U$45.3 U$45.5 U$45.6 U$45.7
GND7: C29.1 C30.2 C31.2 C32.2 SL8.5 U$52.3 U$52.5 U$52.6 U$52.7
GND8: C33.1 C34.2 C35.2 C36.2 SL9.5 U$59.3 U$59.5 U$59.6 U$59.7
GND9: C37.1 C38.2 C39.2 C40.2 SL10.5 U$66.3 U$66.5 U$66.6 U$66.7
GND10: C41.1 C42.2 C43.2 C44.2 SL11.5 U$73.3 U$73.5 U$73.6 U$73.7
GND11: C45.1 C46.2 C47.2 C48.2 SL12.5 U$80.3 U$80.5 U$80.6 U$80.7
GND12: C49.1 C50.2 C51.2 C52.2 SL13.5 U$87.3 U$87.5 U$87.6 U$87.7
GND13: C53.1 C54.2 C55.2 C56.2 SL14.5 U$94.3 U$94.5 U$94.6 U$94.7
GND14: C57.1 C58.2 C59.2 C60.2 SL15.5 U$101.3 U$101.5 U$101.6 U$101.7
GND15: C61.1 C62.2 C63.2 C64.2 SL16.5 U$108.3 U$108.5 U$108.6 U$108.7
GND16: C65.1 C66.2 C67.2 C68.2 SL17.5 U$115.3 U$115.5 U$115.6 U$115.7
GND17: C69.1 C70.2 C71.2 C72.2 SL18.5 U$122.3 U$122.5 U$122.6 U$122.7
GND18: C73.1 C74.2 C75.2 C76.2 SL19.5 U$129.3 U$129.5 U$129.6 U$129.7
GND19: C77.1 C78.2 C79.2 C80.2 SL20.5 U$136.3 U$136.5 U$136.6 U$136.7
GND20: C81.1 C82.2 C83.2 C84.2 SL21.5 U$143.3 U$143.5 U$143.6 U$143.7
GND21: C85.1 C86.2 C87.2 C88.2 SL22.5 U$150.3 U$150.5 U$150.6 U$150.7
GND22: C89.1 C90.2 C91.2 C92.2 SL23.5 U$157.3 U$157.5 U$157.6 U$157.7
GND23: C93.1 C94.2 C95.2 C96.2 SL24.5 U$164.3 U$164.5 U$164.6 U$164.7
GND24: C97.1 C98.2 C99.2 C100.2 SL25.5 U$171.3 U$171.5 U$171.6 U$171.7
GND25: C101.1 C102.2 C103.2 C104.2 SL26.5 U$178.3 U$178.5 U$178.6 U$178.7
GND26: C105.1 C106.2 C107.2 C108.2 SL27.5 U$185.3 U$185.5 U$185.6 U$185.7
GND27: C109.1 C110.2 C111.2 C112.2 SL28.5 U$192.3 U$192.5 U$192.6 U$192.7
GND28: C113.1 C114.2 C115.2 C116.2 SL29.5 U$199.3 U$199.5 U$199.6 U$199.7
GND29: C117.1 C118.2 C119.2 C120.2 SL30.5 U$206.3 U$206.5 U$206.6 U$206.7
GND30: C121.1 C122.2 C123.2 C124.2 SL31.5 U$213.3 U$213.5 U$213.6 U$213.7
GND31: C125.1 C126.2 C127.2 C128.2 SL32.5 U$220.3 U$220.5 U$220.6 U$220.7
GND32: C129.1 C130.2 C131.2 C132.2 SL33.5 U$227.3 U$227.5 U$227.6 U$227.7
GND33: C133.1 C134.2 C135.2 C136.2 SL34.5 U$234.3 U$234.5 U$234.6 U$234.7
GND34: C137.1 C138.2 C139.2 C140.2 SL35.5 U$241.3 U$241.5 U$241.6 U$241.7
GND35: C141.1 C142.2 C143.2 C144.2 SL36.5 U$248.3 U$248.5 U$248.6 U$248.7
GND36: C145.1 C146.2 C147.2 C148.2 SL37.5 U$255.3 U$255.5 U$255.6 U$255.7
GND37: C149.1 C150.2 C151.2 C152.2 SL38.5 U$262.3 U$262.5 U$262.6 U$262.7
GND38: C153.1 C154.2 C155.2 C156.2 SL39.5 U$269.3 U$269.5 U$269.6 U$269.7
GND39: C157.1 C158.2 C159.2 C160.2 SL40.5 U$276.3 U$276.5 U$276.6 U$276.7
GND40: C161.1 C162.2 C163.2 C164.2 SL41.5 U$283.3 U$283.5 U$283.6 U$283.7
GND41: C165.1 C166.2 C167.2 C168.2 SL42.5 U$290.3 U$290.5 U$290.6 U$290.7
ST: SL1.1 U$4.2
ST1: SL2.1 U$10.2
ST2: SL3.1 U$17.2
ST3: SL4.1 U$24.2
ST4: SL5.1 U$31.2
ST5: SL6.1 U$38.2
ST6: SL7.1 U$45.2
ST7: SL8.1 U$52.2
ST8: SL9.1 U$59.2
ST9: SL10.1 U$66.2
ST10: SL11.1 U$73.2
ST11: SL12.1 U$80.2
ST12: SL13.1 U$87.2
ST13: SL14.1 U$94.2
ST14: SL15.1 U$101.2
ST15: SL16.1 U$108.2
ST16: SL17.1 U$115.2
ST17: SL18.1 U$122.2
ST18: SL19.1 U$129.2
ST19: SL20.1 U$136.2
ST20: SL21.1 U$143.2
ST21: SL22.1 U$150.2
ST22: SL23.1 U$157.2
ST23: SL24.1 U$164.2
ST24: SL25.1 U$171.2
ST25: SL26.1 U$178.2
ST26: SL27.1 U$185.2
ST27: SL28.1 U$192.2
ST28: SL29.1 U$199.2
ST29: SL30.1 U$206.2
ST30: SL31.1 U$213.2
ST31: SL32.1 U$220.2
ST32: SL33.1 U$227.2
ST33: SL34.1 U$234.2
ST34: SL35.1 U$241.2
ST35: SL36.1 U$248.2
ST36: SL37.1 U$255.2
ST37: SL38.1 U$262.2
ST38: SL39.1 U$269.2
ST39: SL40.1 U$276.2
ST40: SL41.1 U$283.2
ST41: SL42.1 U$290.2
VCC: C2.1 SL1.6 U$4.14 U$4.15
VCC1: C6.1 SL2.6 U$10.14 U$10.15
VCC2: C10.1 SL3.6 U$17.14 U$17.15
VCC3: C14.1 SL4.6 U$24.14 U$24.15
VCC4: C18.1 SL5.6 U$31.14 U$31.15
VCC5: C22.1 SL6.6 U$38.14 U$38.15
VCC6: C26.1 SL7.6 U$45.14 U$45.15
VCC7: C30.1 SL8.6 U$52.14 U$52.15
VCC8: C34.1 SL9.6 U$59.14 U$59.15
VCC9: C38.1 SL10.6 U$66.14 U$66.15
VCC10: C42.1 SL11.6 U$73.14 U$73.15
VCC11: C46.1 SL12.6 U$80.14 U$80.15
VCC12: C50.1 SL13.6 U$87.14 U$87.15
VCC13: C54.1 SL14.6 U$94.14 U$94.15
VCC14: C58.1 SL15.6 U$101.14 U$101.15
VCC15: C62.1 SL16.6 U$108.14 U$108.15
VCC16: C66.1 SL17.6 U$115.14 U$115.15
VCC17: C70.1 SL18.6 U$122.14 U$122.15
VCC18: C74.1 SL19.6 U$129.14 U$129.15
VCC19: C78.1 SL20.6 U$136.14 U$136.15
VCC20: C82.1 SL21.6 U$143.14 U$143.15
VCC21: C86.1 SL22.6 U$150.14 U$150.15
VCC22: C90.1 SL23.6 U$157.14 U$157.15
VCC23: C94.1 SL24.6 U$164.14 U$164.15
VCC24: C98.1 SL25.6 U$171.14 U$171.15
VCC25: C102.1 SL26.6 U$178.14 U$178.15
VCC26: C106.1 SL27.6 U$185.14 U$185.15
VCC27: C110.1 SL28.6 U$192.14 U$192.15
VCC28: C114.1 SL29.6 U$199.14 U$199.15
VCC29: C118.1 SL30.6 U$206.14 U$206.15
VCC30: C122.1 SL31.6 U$213.14 U$213.15
VCC31: C126.1 SL32.6 U$220.14 U$220.15
VCC32: C130.1 SL33.6 U$227.14 U$227.15
VCC33: C134.1 SL34.6 U$234.14 U$234.15
VCC34: C138.1 SL35.6 U$241.14 U$241.15
VCC35: C142.1 SL36.6 U$248.14 U$248.15
VCC36: C146.1 SL37.6 U$255.14 U$255.15
VCC37: C150.1 SL38.6 U$262.14 U$262.15
VCC38: C154.1 SL39.6 U$269.14 U$269.15
VCC39: C158.1 SL40.6 U$276.14 U$276.15
VCC40: C162.1 SL41.6 U$283.14 U$283.15
VCC41: C166.1 SL42.6 U$290.14 U$290.15
XOUT: C4.1 SL1.4 U$4.12
XOUT1: C8.1 SL2.4 U$10.12
XOUT2: C12.1 SL3.4 U$17.12
XOUT3: C16.1 SL4.4 U$24.12
XOUT4: C20.1 SL5.4 U$31.12
XOUT5: C24.1 SL6.4 U$38.12
XOUT6: C28.1 SL7.4 U$45.12
XOUT7: C32.1 SL8.4 U$52.12
XOUT8: C36.1 SL9.4 U$59.12
XOUT9: C40.1 SL10.4 U$66.12
XOUT10: C44.1 SL11.4 U$73.12
XOUT11: C48.1 SL12.4 U$80.12
XOUT12: C52.1 SL13.4 U$87.12
XOUT13: C56.1 SL14.4 U$94.12
XOUT14: C60.1 SL15.4 U$101.12
XOUT15: C64.1 SL16.4 U$108.12
XOUT16: C68.1 SL17.4 U$115.12
XOUT17: C72.1 SL18.4 U$122.12
XOUT18: C76.1 SL19.4 U$129.12
XOUT19: C80.1 SL20.4 U$136.12
XOUT20: C84.1 SL21.4 U$143.12
XOUT21: C88.1 SL22.4 U$150.12
XOUT22: C92.1 SL23.4 U$157.12
XOUT23: C96.1 SL24.4 U$164.12
XOUT24: C100.1 SL25.4 U$171.12
XOUT25: C104.1 SL26.4 U$178.12
XOUT26: C108.1 SL27.4 U$185.12
XOUT27: C112.1 SL28.4 U$192.12
XOUT28: C116.1 SL29.4 U$199.12
XOUT29: C120.1 SL30.4 U$206.12
XOUT30: C124.1 SL31.4 U$213.12
XOUT31: C128.1 SL32.4 U$220.12
XOUT32: C132.1 SL33.4 U$227.12
XOUT33: C136.1 SL34.4 U$234.12
XOUT34: C140.1 SL35.4 U$241.12
XOUT35: C144.1 SL36.4 U$248.12
XOUT36: C148.1 SL37.4 U$255.12
XOUT37: C152.1 SL38.4 U$262.12
XOUT38: C156.1 SL39.4 U$269.12
XOUT39: C160.1 SL40.4 U$276.12
XOUT40: C164.1 SL41.4 U$283.12
XOUT41: C168.1 SL42.4 U$290.12
YOUT: C3.1 SL1.3 U$4.10
YOUT1: C7.1 SL2.3 U$10.10
YOUT2: C11.1 SL3.3 U$17.10
YOUT3: C15.1 SL4.3 U$24.10
YOUT4: C19.1 SL5.3 U$31.10
YOUT5: C23.1 SL6.3 U$38.10
YOUT6: C27.1 SL7.3 U$45.10
YOUT7: C31.1 SL8.3 U$52.10
YOUT8: C35.1 SL9.3 U$59.10
YOUT9: C39.1 SL10.3 U$66.10
YOUT10: C43.1 SL11.3 U$73.10
YOUT11: C47.1 SL12.3 U$80.10
YOUT12: C51.1 SL13.3 U$87.10
YOUT13: C55.1 SL14.3 U$94.10
YOUT14: C59.1 SL15.3 U$101.10
YOUT15: C63.1 SL16.3 U$108.10
YOUT16: C67.1 SL17.3 U$115.10
YOUT17: C71.1 SL18.3 U$122.10
YOUT18: C75.1 SL19.3 U$129.10
YOUT19: C79.1 SL20.3 U$136.10
YOUT20: C83.1 SL21.3 U$143.10
YOUT21: C87.1 SL22.3 U$150.10
YOUT22: C91.1 SL23.3 U$157.10
YOUT23: C95.1 SL24.3 U$164.10
YOUT24: C99.1 SL25.3 U$171.10
YOUT25: C103.1 SL26.3 U$178.10
YOUT26: C107.1 SL27.3 U$185.10
YOUT27: C111.1 SL28.3 U$192.10
YOUT28: C115.1 SL29.3 U$199.10
YOUT29: C119.1 SL30.3 U$206.10
YOUT30: C123.1 SL31.3 U$213.10
YOUT31: C127.1 SL32.3 U$220.10
YOUT32: C131.1 SL33.3 U$227.10
YOUT33: C135.1 SL34.3 U$234.10
YOUT34: C139.1 SL35.3 U$241.10
YOUT35: C143.1 SL36.3 U$248.10
YOUT36: C147.1 SL37.3 U$255.10
YOUT37: C151.1 SL38.3 U$262.10
YOUT38: C155.1 SL39.3 U$269.10
YOUT39: C159.1 SL40.3 U$276.10
YOUT40: C163.1 SL41.3 U$283.10
YOUT41: C167.1 SL42.3 U$290.10
ZOUT: C1.2 SL1.2 U$4.8
ZOUT1: C5.2 SL2.2 U$10.8
ZOUT2: C9.2 SL3.2 U$17.8
ZOUT3: C13.2 SL4.2 U$24.8
ZOUT4: C17.2 SL5.2 U$31.8
ZOUT5: C21.2 SL6.2 U$38.8
ZOUT6: C25.2 SL7.2 U$45.8
ZOUT7: C29.2 SL8.2 U$52.8
ZOUT8: C33.2 SL9.2 U$59.8
ZOUT9: C37.2 SL10.2 U$66.8
ZOUT10: C41.2 SL11.2 U$73.8
ZOUT11: C45.2 SL12.2 U$80.8
ZOUT12: C49.2 SL13.2 U$87.8
ZOUT13: C53.2 SL14.2 U$94.8
ZOUT14: C57.2 SL15.2 U$101.8
ZOUT15: C61.2 SL16.2 U$108.8
ZOUT16: C65.2 SL17.2 U$115.8
ZOUT17: C69.2 SL18.2 U$122.8
ZOUT18: C73.2 SL19.2 U$129.8
ZOUT19: C77.2 SL20.2 U$136.8
ZOUT20: C81.2 SL21.2 U$143.8
ZOUT21: C85.2 SL22.2 U$150.8
ZOUT22: C89.2 SL23.2 U$157.8
ZOUT23: C93.2 SL24.2 U$164.8
ZOUT24: C97.2 SL25.2 U$171.8
ZOUT25: C101.2 SL26.2 U$178.8
ZOUT26: C105.2 SL27.2 U$185.8
ZOUT27: C109.2 SL28.2 U$192.8
ZOUT28: C113.2 SL29.2 U$199.8
ZOUT29: C117.2 SL30.2 U$206.8
ZOUT30: C121.2 SL31.2 U$213.8
ZOUT31: C125.2 SL32.2 U$220.8
ZOUT32: C129.2 SL33.2 U$227.8
ZOUT33: C133.2 SL34.2 U$234.8
ZOUT34: C137.2 SL35.2 U$241.8
ZOUT35: C141.2 SL36.2 U$248.8
ZOUT36: C145.2 SL37.2 U$255.8
ZOUT37: C149.2 SL38.2 U$262.8
ZOUT38: C153.2 SL39.2 U$269.8
ZOUT39: C157.2 SL40.2 U$276.8
ZOUT40: C161.2 SL41.2 U$283.8
ZOUT41: C165.2 SL42.2 U$290.8